# Altium PCB RF.PcbDoc
Units mm, origin at the board's own origin, x right, y up, seen from the top; angles counter-clockwise.
Board outline 90 x 47 mm, 2 copper layers (Top Layer, Bottom Layer); 37 components, 52 nets, 159 pads, 373 vias.
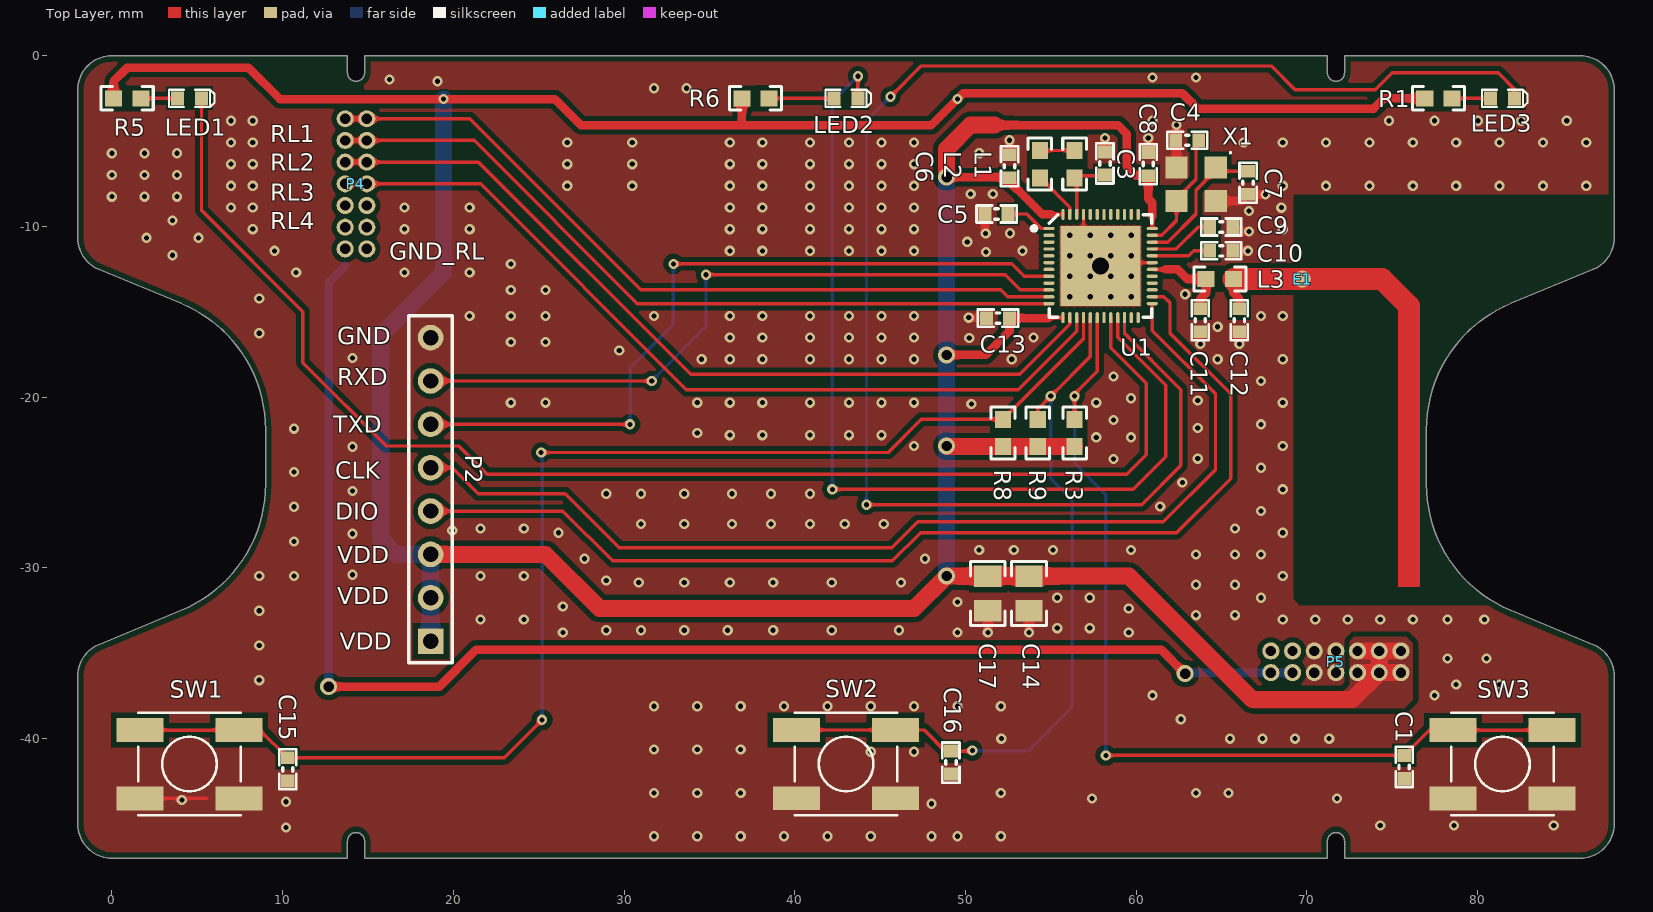
[diagram p0: Top Layer view]
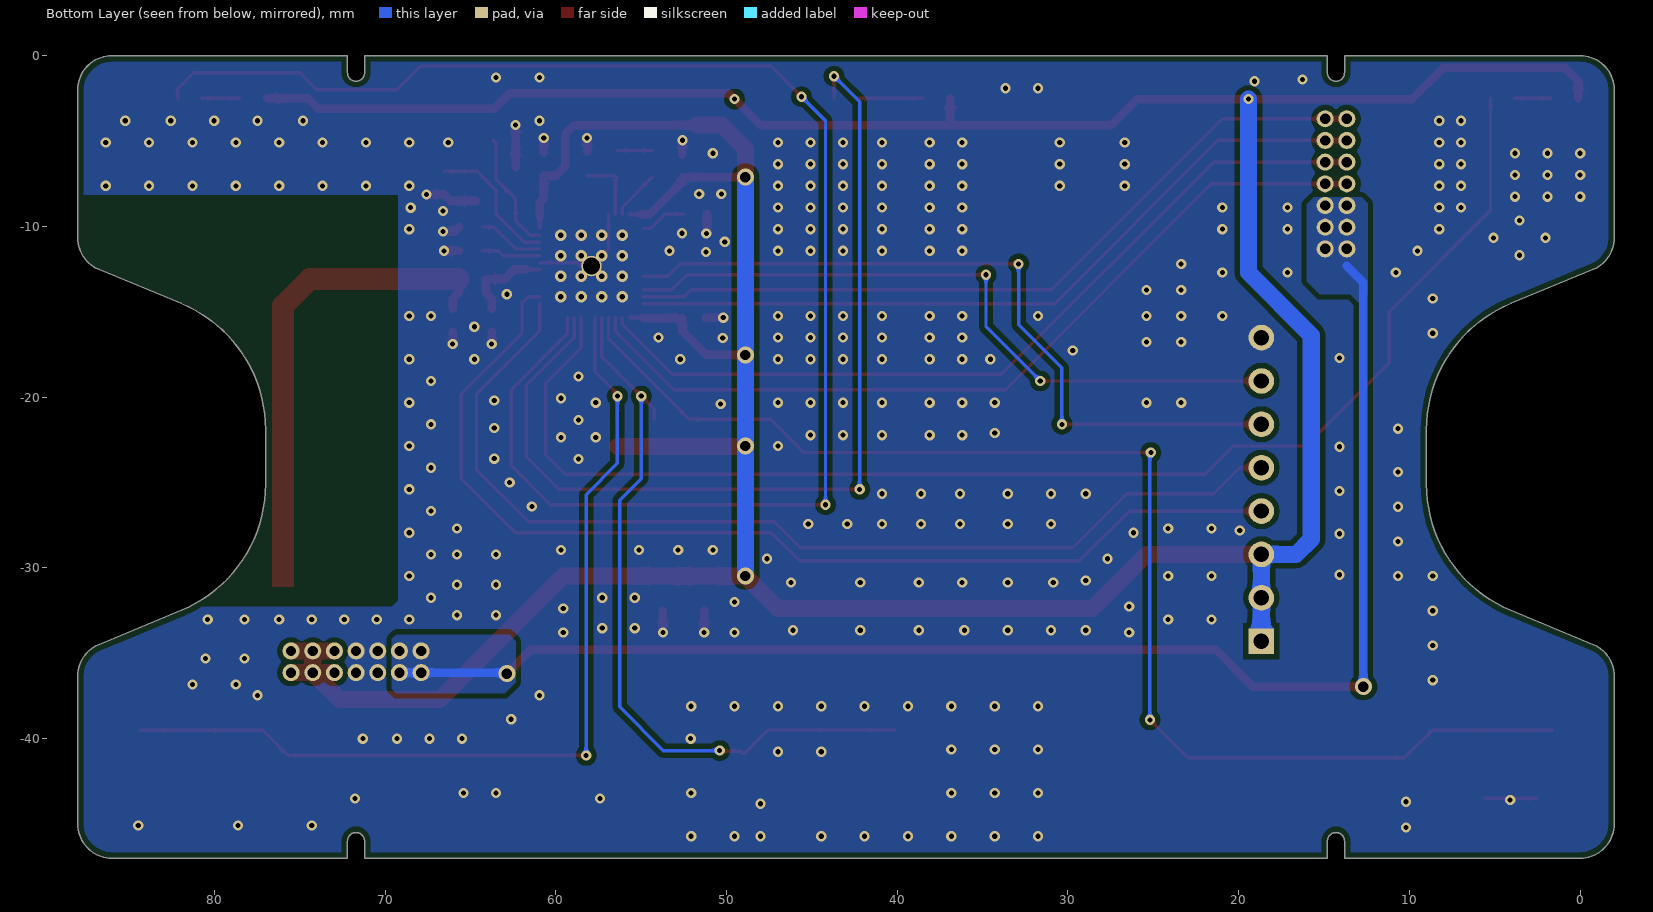
[diagram p1: Bottom Layer view, seen from below]
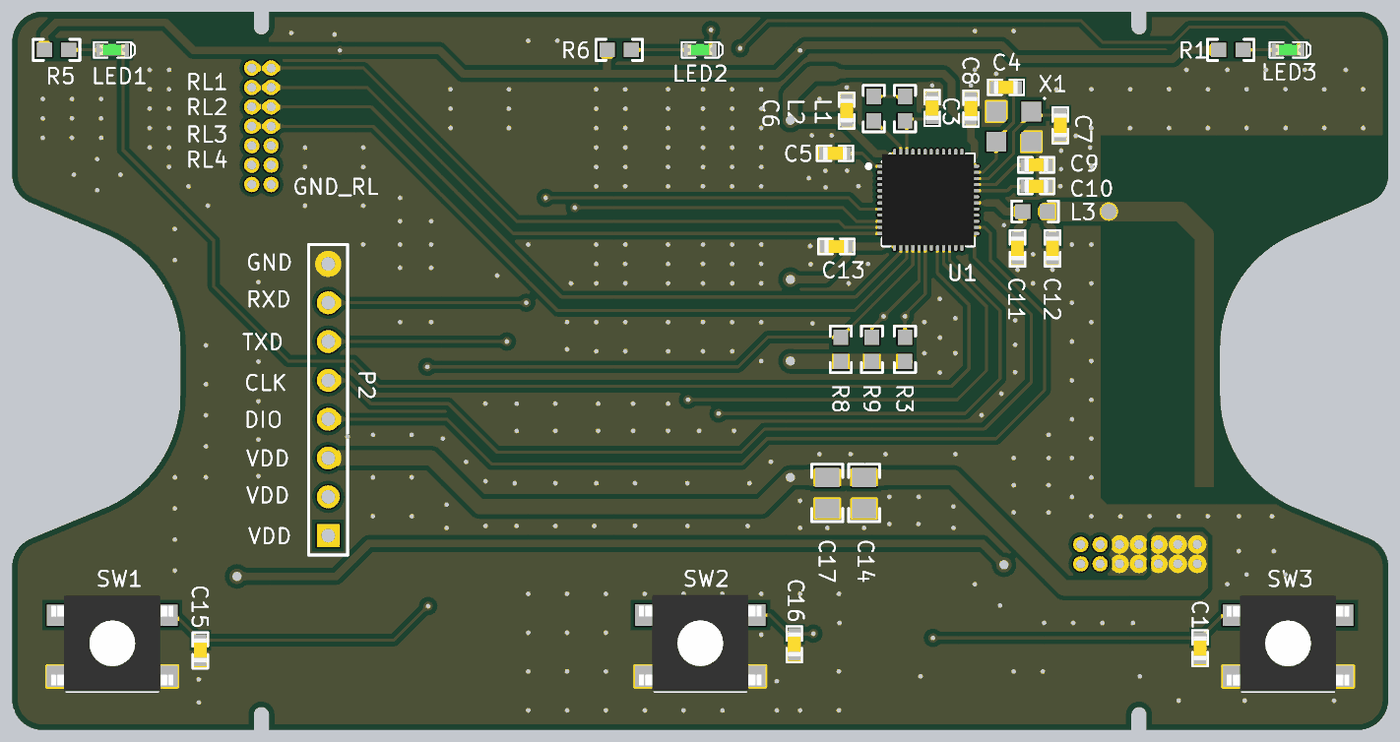
[diagram p2: 3D render of the assembled board from above, using the file's embedded part models]

## Layer stack, top to bottom
Top Solder: solder mask 0.0102, Solder Resist, Dk 3.5
Top Layer: signal copper 0.0356
Dielectric 1: dielectric 0.32, FR-4, Dk 4.8
Bottom Layer: signal copper 0.0356
Bottom Solder: solder mask 0.0102, Solder Resist, Dk 3.5

## Board outline
-2,-45 -2,-36.336 cw(c0,-36.336) -0.765,-34.489 4.061,-32.489 ccw(c1,-25.098) 9,-25.098 9,-21.902 ccw(c1,-21.902) 4.061,-14.511 -0.765,-12.511 cw(c0,-10.664) -2,-10.664 -2,-2 cw(c0,-2) 0,0 13.8,0 13.8,-1 ccw(c14.3,-1) 14.8,-1 14.8,0 71.2,0 71.2,-1 ccw(c71.7,-1) 72.2,-1 72.2,0 86,0 cw(c86,-2) 88,-2 88,-10.664 cw(c86,-10.664) 86.765,-12.511 81.939,-14.511 ccw(c85,-21.902) 77,-21.902 77,-25.098 ccw(c85,-25.098) 81.939,-32.489 86.765,-34.489 cw(c86,-36.336) 88,-36.336 88,-45 cw(c86,-45) 86,-47 72.2,-47 72.2,-46 ccw(c71.7,-46) 71.2,-46 71.2,-47 14.8,-47 14.8,-46 ccw(c14.3,-46) 13.8,-46 13.8,-47 0,-47 cw(c0,-45)

## Design rules (kind name [scope] priority, off if disabled: settings)
Clearance [All] p1: gap=0.3
HoleSize [All] p1: absolutevalues=TRUE maxlimit=10 minlimit=0.025 maxpercent=80.000 minpercent=20.000
MinimumSolderMaskSliver [All] p1: minsoldermaskwidth=0.01
PolygonConnect [All] p1: connectstyle=Direct reliefconductorwidth=0.254 reliefentries=4 polygonreliefangle="90 Angle" airgapwidth=0.254
RoutingVias [All] p1: holewidth=0.711 width=1.27 viastyle="Through Hole" minholewidth=0.3 minwidth=0.3 maxholewidth=5 maxwidth=5
SilkToSilkClearance [All] p1: silktosilkclearance=0.127
SilkToSolderMaskClearance [IsPad] p1: minsilkscreentomaskgap=0.01 clearancetoexposedcopper=TRUE
SolderMaskExpansion [All] p1: expansion=0.102
Width [All] p1: maxlimit=2 minlimit=0.2 preferedwidth=0.254
26 further rules are at their usual default settings.

## Components (designator, comment, footprint, x,y, rotation, side; value= is the part's Value field where it differs from the comment)
C1 "1.0µF" CAPC1608X06L 75.692,-41.656 r90 top
C3 "1.0µF" CAPC1608X06L 58.166,-6.31 r270 top
C4 "12pF" CAPC1608X06L 62.992,-4.953 r180 top
C5 "100nF" CAPC1608X06L 51.816,-9.271 r180 top
C6 "4.7µF" CAPC1608X06L 52.578,-6.477 r90 top
C7 "12pF" CAPC1608X06L 66.548,-7.442 r270 top
C8 "100nF" CAPC1608X06L 60.706,-6.35 r90 top
C9 "100pF" CAPC1608X06L 64.984,-10.033 r0 top
C10 "N.C." CAPC1608X06L 64.984,-11.43 r0 top
C11 "0.8pF" CAPC1608X06L 63.754,-15.494 r90 top
C12 "1.2pF" CAPC1608X06L 66.04,-15.494 r270 top
C13 "100nF" CAPC1608X06L 51.903,-15.367 r180 top
C14 "106" 0805_HV 53.721,-31.496 r90 top
C15 "1.0µF" CAPC1608X06L 10.3,-41.8 r270 top
C16 "1.0µF" CAPC1608X06L 49.149,-41.402 r90 top
C17 "104" 0805_HV 51.308,-31.496 r90 top
E1 "Antenna" nrfant 69.723,-13.081 r270 top locked
L1 "15nH" 0603 56.388,-6.35 r90 top
L2 "10µH" 0603 54.356,-6.35 r270 top
L3 "3.9nH" 0603 64.897,-13.081 r0 top
LED1 "L0603G" LED_0603_G 4.55,-2.5 r180 top
LED2 "L0603G" LED_0603_G 43,-2.5 r180 top
LED3 "L0603G" LED_0603_G 81.45,-2.5 r180 top
P2 "Header 8" HDR1X8 18.669,-34.29 r90 top
P4 "Header 7X2" CON14_1.27 13.664,-3.693 r270 top locked
P5 "Header 7X2" CON14_1.27 75.505,-34.865 r180 top
R1 "220R" 0603 77.7,-2.5 r180 top
R3 "100k" 0603 56.388,-22.098 r270 top
R5 "220R" 0603 0.9,-2.5 r180 top
R6 "220R" 0603 37.7,-2.5 r180 top
R8 "100k" 0603 52.197,-22.098 r270 top
R9 "100k" 0603 54.229,-22.098 r270 top
SW1 "PB SW" KSC521J 4.545,-41.498 r0 top
SW2 "PB SW" KSC521J 43.004,-41.492 r0 top
SW3 "PB SW" KSC521J 81.448,-41.502 r0 top
U1 "nRF52832-QFAA" QFN40P600X600X90-48N 57.912,-12.319 r0 top
X1 "CX3225SB32000D0FFFCC" SON230P260X60-4N 63.507,-7.524 r270 top

## Footprints (in the part's own frame and the unit in brackets; to place one, negate y for a bottom-side part, rotate by r counter-clockwise, add the part's x,y. Pads: shape width x height; smd on the part's side, far side on the other; paste and mask are expansions set on the pad)
0603 [mm] "0603 from SM-752 data"
  rect 1x0.95 smd: 1(-0.8,0) 2(0.8,0)
  silkscreen extent -1.52,-0.69 1.52,0.69, body extent -0.87,-0.47 0.87,0.47, height 1
0805_HV [mil] "0805 with 30mil clearance between pads"
  rect 50x63 smd: 1(-40,0) 2(40,0)
  silkscreen extent -74,-40 74,40, body extent -43,-29 43,29, height 57
CAPC1608X06L [mm]
  rect 0.75x0.8 smd: 1(-0.675,0) 2(0.675,0)
  silkscreen extent -1.17,-0.5 1.17,0.5, body extent -0.8,-0.43 0.8,0.43, height 0.8
CON14_1.27 [mm]
  round 1 hole 0.6: 1(0,0) 2(0,1.27) 3(1.27,0) 4(1.27,1.27) 5(2.54,0) 6(2.54,1.27) 7(3.81,0) 8(3.81,1.27) 9(5.08,0) 10(5.08,1.27) 11(6.35,0) 12(6.35,1.27) 13(7.62,0) 14(7.62,1.27)
HDR1X8 [mm] "Connector; Header; 8 Position"
  rect 1.5x1.5 hole 0.9: 1(0,0)
  round 1.5 hole 0.9: 2(2.54,0) 3(5.08,0) 4(7.62,0) 5(10.16,0) 6(12.7,0) 7(15.24,0) 8(17.78,0)
  silkscreen extent -1.27,-1.27 19.05,1.27
KSC521J [mm] "6.2×6.2mm TACT Switch, without ground connector"
  rect 2.75x1.4 smd: 1(-2.9,-2) 1(2.901,-2) 2(-2.9,2) 2(2.901,2)
  silkscreen extent -3,-2.99 3,3.01, body extent -4,-2.99 4,3.31, height 3.1
LED_0603_G [mil]
  rect 30x32 smd: 1(-27.5,0) 2(27.5,0)
  silkscreen extent -58,-20 48,20, body extent -32,-16 32,16, height 24
nrfant [mm]
  round 1 smd: 1(0,0)
  Top Layer region: 18.047,5.616 18.047,6.886 17.285,6.886 17.285,5.616
  Top Layer lines w1.27: 0,0 0,0.127 0,4.689 1.559,6.248 17.401,6.248
QFN40P600X600X90-48N [mm]
  oval 0.65x0.2 smd: 1(-3.025,2.2) 2(-3.025,1.8) 3(-3.025,1.4) 4(-3.025,1) 5(-3.025,0.6) 6(-3.025,0.2) 7(-3.025,-0.2) 8(-3.025,-0.6) 9(-3.025,-1) 10(-3.025,-1.4) 11(-3.025,-1.8) 12(-3.025,-2.2) 25(3.025,-2.2) 26(3.025,-1.8) 27(3.025,-1.4) 28(3.025,-1) 29(3.025,-0.6) 30(3.025,-0.2) 31(3.025,0.2) 32(3.025,0.6) 33(3.025,1) 34(3.025,1.4) 35(3.025,1.8) 36(3.025,2.2)
  oval 0.2x0.65 smd: 13(-2.2,-3.025) 14(-1.8,-3.025) 15(-1.4,-3.025) 16(-1,-3.025) 17(-0.6,-3.025) 18(-0.2,-3.025) 19(0.2,-3.025) 20(0.6,-3.025) 21(1,-3.025) 22(1.4,-3.025) 23(1.8,-3.025) 24(2.2,-3.025) 37(2.2,3.025) 38(1.8,3.025) 39(1.4,3.025) 40(1,3.025) 41(0.6,3.025) 42(0.2,3.025) 43(-0.2,3.025) 44(-0.6,3.025) 45(-1,3.025) 46(-1.4,3.025) 47(-1.8,3.025) 48(-2.2,3.025)
  rect 4.7x4.7 smd: 49(0,0)
  silkscreen extent -4.02,-3 3,3, body extent -3.02,-3.02 3.02,3.02, height 0.86
SON230P260X60-4N [mm] "SON, 4-Leads, Body 3.25x2.55mm, Pitch 2.30mm, IPC Medium Density"
  rect 1.3x1.3 smd: 1(-0.985,1.15) 2(-0.985,-1.15) 3(0.985,-1.15) 4(0.985,1.15)
  silkscreen extent -1.9,1.96 -1.8,2.06, body extent -1.3,-1.65 1.3,1.65, height 0.6

## Part data
C1 C15 C16: library part C0402-1µ0, "Capacitor, X5R, ±5%"
C3: library part C0603-1µ0, "Capacitor, X7R, ±10%"
C4 C7: library part C0402-12p, "Capacitor, NP0, ±2%"
C5 C8 C13: library part C0402-100n, "Capacitor, X7R, ±10%"
C6: library part C0603-4µ7, "Capacitor, X5R, ±10%"
C9: library part C0402-100p, "Capacitor, NP0, ±5%"
C10: library part C0402-N.C., "Not mounted"
C11: library part C0402-0.8p, "Capacitor, NP0, ±5%"
C12: library part C0402-1.2p, "Capacitor, NP0, ±0.1pF"
C14 C17: library part CM, "Cap SMD"
E1: "Generic Antenna"
L1: library part L0402-15n, "Inductor, 320mA, ±5%"
L2: library part L0603-10µ, "Inductor, 80mA, ±10%"
L3: library part L0402-3n9, "Inductor, 170mA, ±0.1nH"
LED1 LED2 LED3: library part "LG L29K Smartled Green", "LED SMARTLED GREEN 570NM 0603"
P2: "Header, 8-Pin"
P4 P5: "Header, 7-Pin, Dual row"
R1 R5 R6: library part R0402-220, "Resistor, ±1%, 0.063W"
R3 R8 R9: library part R0402-100k, "Resistor, ±1%, 0.063W"
SW1 SW2 SW3: library part Switch-PB-6.2x6.3mm-SMD, "Tactile Switch, SPNO, SMD, 160gf, 6.2x6.3x2.5mm"
U1: "Multi-protocol Bluetooth Low Energy and 2.4GHz proprietary system-on-chip"
X1: library part XTAL_SMD2016_32MHz_8pF_Epson, "XTAL SMD 2016, 32MHz, Cl=8pF, Tol: ±10ppm, Stab: ±10ppm"

## Free pads (board coordinates)
  round 1.2 hole 1: 0(57.912,-12.319)

## Via types
v1: diameter 0.6, hole 0.3, Top Layer to Bottom Layer, tented both sides, 351 vias
v2: diameter 0.66, hole 0.33, Top Layer to Bottom Layer, tented both sides, 16 vias
v3: diameter 1, hole 0.6, Top Layer to Bottom Layer, tented both sides, 6 vias

## Nets (pads, with @x,y where several pads share a name; then routed paths per layer and width w, separated by ;. In a path a pad name is that pad's centre, name@x,y a point inside that pad or via, vN(x,y) a via of type N, cw(c..) or ccw(c..) an arc to the next point about the centre after c; other vN are vias at no path point)
ANT: C12.1 E1.1 L3.2 | length 6
  Top Layer w0.5: L3.2 65.697,-13.881 66.04,-14.224 C12.1
  Top Layer w1.27: L3.2 E1.1 E1.1@69.85,-13.081
BUTTON1: C15.1 R8.1 SW1.2 U1.16 | length 76.5
  Top Layer w0.2: SW1.2@1.645,-39.498 7.446,-39.498 8.673,-39.498 C15.1 22.975,-41.125 v1(25.2,-38.9) ; v1(25.146,-23.241) 45.466,-23.241 47.409,-21.298 R8.1@52.108,-21.298 ; R8.1 56.912,-16.583 U1.16
  Bottom Layer w0.2: v1(25.146,-23.241) 25.2,-23.295 v1(25.2,-38.9)
BUTTON2: C16.2 R9.1 SW2.2 U1.17 | length 43.8
  Top Layer w0.2: SW2.2@40.104,-39.492 45.905,-39.492 47.568,-39.492 48.976,-40.9 C16.2 50.373,-40.727 v1(50.4,-40.7) ; R9.1 54.229,-20.701 v1(54.991,-19.939) 57.312,-17.618 U1.17
  Bottom Layer w0.2: v1(50.4,-40.7) 53.7,-40.7 56.261,-38.139 56.261,-26.035 54.991,-24.765 v1(54.991,-19.939)
BUTTON3: C1.2 R3.1 SW3.2 U1.18 | length 55
  Top Layer w0.2: R3.1 v1(56.388,-19.939) 56.388,-19.812 57.712,-18.488 U1.18 ; v1(58.219,-40.981) C1.2 77.171,-39.502 78.548,-39.502 SW3.2@84.349,-39.502
  Bottom Layer w0.2: v1(56.388,-19.939) 56.388,-23.876 58.219,-25.707 v1(58.219,-40.981)
CTS: 
DEC1: C5.1 U1.1 | length 2.7
  Top Layer w0.2: C5.1 53.594,-9.271 54.442,-10.119 U1.1
DEC2: C10.1 U1.32 | length 3.5
  Top Layer w0.2: U1.32 63.084,-11.719 63.373,-11.43 C10.1
DEC3: C9.1 U1.33 | length 3.9
  Top Layer w0.2: U1.33 62.341,-11.319 63.627,-10.033 C9.1
DEC4: C3.2 L1.1 U1.46 | length 4
  Top Layer w0.2: U1.46 56.512,-7.274 L1.1 56.513,-7.025 C3.2@58.166,-7.025
GND: C1.1 C3.1 C4.2 C5.2 C6.2 C7.2 C8.2 C9.2 C10.2 C11.1 C12.2 C13.2 C14.1 C15.2 C16.1 C17.1 P2.8 P5.7 P5.8 P5.9 P5.10 pad.0 SW1.1 SW2.1 SW3.1 U1.31 U1.45 U1.49 X1.2 X1.4 | length 25.8
  Top Layer w0.2: SW1.1@2.54,-43.499 5.568,-43.499 ; U1.45 56.912,-11.319 v2(57.312,-11.719) pad.0 58.112,-12.119 U1.31
  Top Layer w0.5: v1(50.19,-15.342) 51.203,-15.342 C13.2 ; C5.2 51.141,-10.374 v1(51.181,-10.414) ; v1(51.308,-33.782) C17.1 ; C6.2 v1(52.578,-4.953) ; v1(53.721,-33.782) C14.1 ; C3.1 v1(58.166,-4.826) ; C8.2 v1(60.706,-4.826) ; X1.2 v1(62.357,-4.064) ; v1(63.754,-16.891) C11.1 ; X1.4 66.156,-8.509 C7.2 67.553,-8.117 v1(67.564,-8.128) ; C10.2 v1(66.548,-11.43) ; C9.2 65.926,-10.3 v1(66.6,-10.3) ; v1(66.04,-16.891) C12.2
  other v1: 31.75,-45.72 34.29,-45.72 36.83,-45.72 39.37,-45.72 41.91,-45.72 44.45,-45.72 48.006,-45.72 49.53,-45.72 52.07,-45.72 10.2,-45.2 74.295,-45.085 78.613,-45.085 84.455,-45.085 48.006,-43.815 10.2,-43.7 4.1,-43.6 57.404,-43.499 71.755,-43.499 31.75,-43.18 34.29,-43.18 36.83,-43.18 52.07,-43.18 63.5,-43.18 65.405,-43.18 44.45,-40.767 46.99,-40.767 31.75,-40.64 34.29,-40.64 36.83,-40.64 52.1,-40 65.49,-40 67.395,-40 69.3,-40 71.3,-40 62.611,-38.862 31.75,-38.1 34.29,-38.1 36.83,-38.1 39.37,-38.1 41.91,-38.1 44.45,-38.1 46.99,-38.1 49.53,-38.1 52.07,-38.1 60.96,-37.465 77.47,-37.465 78.74,-36.83 81.28,-36.83 8.636,-36.576 78.232,-35.306 80.518,-35.306 8.636,-34.544 26.416,-33.782 49.53,-33.782 59.563,-33.782 28.956,-33.655 30.988,-33.655 33.528,-33.655 36.068,-33.655 38.735,-33.655 42.164,-33.655 46.101,-33.655 55.372,-33.528 57.277,-33.528 21.59,-33.02 24.13,-33.02 68.58,-33.02 70.485,-33.02 72.39,-33.02 74.295,-33.02 76.2,-33.02 78.232,-33.02 80.391,-33.02 63.5,-32.766 65.786,-32.766 8.636,-32.512 59.563,-32.385 26.416,-32.258 49.53,-32.004 55.372,-31.75 57.277,-31.75 67.31,-31.75 63.5,-30.988 65.786,-30.988 30.861,-30.861 33.528,-30.861 36.195,-30.861 38.735,-30.861 42.164,-30.861 46.228,-30.861 28.956,-30.734 8.636,-30.48 10.668,-30.48 21.59,-30.48 24.13,-30.48 68.58,-30.48 14.1,-30.4 27.686,-29.464 47.625,-29.464 63.5,-29.21 65.786,-29.21 67.31,-29.21 50.8,-28.956 52.832,-28.956 55.118,-28.956 59.69,-28.956 10.668,-28.448 14.1,-28 26.162,-27.94 68.58,-27.94 19.939,-27.813 21.59,-27.686 24.13,-27.686 65.786,-27.686 30.988,-27.432 33.528,-27.432 36.322,-27.432 38.608,-27.432 40.894,-27.432 42.926,-27.432 45.212,-27.432 67.31,-26.67 10.668,-26.416 61.4,-26.4 28.956,-25.654 30.988,-25.654 33.528,-25.654 36.322,-25.654 38.608,-25.654 40.894,-25.654 14.1,-25.5 68.58,-25.4 62.7,-25 10.668,-24.384 67.31,-24.13 58.674,-23.622 63.6,-23.6 14.1,-22.9 46.99,-22.86 68.58,-22.86 57.658,-22.352 59.69,-22.352 36.195,-22.225 38.1,-22.225 40.894,-22.225 43.18,-22.225 45.085,-22.225 34.29,-22.098 10.668,-21.844 63.6,-21.8 67.31,-21.59 58.674,-21.336 50.343,-20.396 23.368,-20.32 25.4,-20.32 34.29,-20.32 36.195,-20.32 38.1,-20.32 40.894,-20.32 43.18,-20.32 45.085,-20.32 46.99,-20.32 57.658,-20.32 68.58,-20.32 63.6,-20.2 59.69,-20.066 67.31,-19.05 58.674,-18.796 34.544,-17.78 36.195,-17.78 38.1,-17.78 40.894,-17.78 43.18,-17.78 45.085,-17.78 46.99,-17.78 52.705,-17.78 64.77,-17.78 68.58,-17.78 14.1,-17.7 29.718,-17.272 23.368,-16.764 25.4,-16.764 50.216,-16.535 36.195,-16.51 38.1,-16.51 40.894,-16.51 43.18,-16.51 45.085,-16.51 46.99,-16.51 53.975,-16.51 8.636,-16.256 64.77,-15.875 20.955,-15.24 23.368,-15.24 25.4,-15.24 31.75,-15.24 36.195,-15.24 38.1,-15.24 40.894,-15.24 43.18,-15.24 45.085,-15.24 46.99,-15.24 67.31,-15.24 68.58,-15.24 8.636,-14.224 62.865,-13.97 23.368,-13.716 25.4,-13.716 10.795,-12.7 17.145,-12.7 20.955,-12.7 23.368,-12.192 3.556,-11.684 51.2,-11.5 9.525,-11.43 36.195,-11.43 38.1,-11.43 40.894,-11.43 43.18,-11.43 45.085,-11.43 46.99,-11.43 53.34,-11.43 50.1,-10.9 2.032,-10.668 5.08,-10.668 52.6,-10.4 8.255,-10.16 17.145,-10.16 20.955,-10.16 36.195,-10.16 38.1,-10.16 40.894,-10.16 43.18,-10.16 45.085,-10.16 46.99,-10.16 68.58,-10.16 3.556,-9.652 66.6,-9.1 68.5,-8.9 6.985,-8.89 8.255,-8.89 17.145,-8.89 20.955,-8.89 36.195,-8.89 38.1,-8.89 40.894,-8.89 43.18,-8.89 45.085,-8.89 46.99,-8.89 0,-8.255 1.905,-8.255 3.81,-8.255 50.3,-8.1 51.6,-8.1 6.985,-7.62 8.255,-7.62 26.67,-7.62 30.48,-7.62 36.195,-7.62 38.1,-7.62 40.894,-7.62 43.18,-7.62 45.085,-7.62 46.99,-7.62 68.58,-7.62 71.12,-7.62 73.66,-7.62 76.2,-7.62 78.74,-7.62 81.28,-7.62 83.82,-7.62 86.36,-7.62 0,-6.985 1.905,-6.985 3.81,-6.985 6.985,-6.35 8.255,-6.35 26.67,-6.35 30.48,-6.35 36.195,-6.35 38.1,-6.35 40.894,-6.35 43.18,-6.35 45.085,-6.35 46.99,-6.35 0,-5.715 1.905,-5.715 3.81,-5.715 50.8,-5.715 6.985,-5.08 8.255,-5.08 26.67,-5.08 30.48,-5.08 36.195,-5.08 38.1,-5.08 40.894,-5.08 43.18,-5.08 45.085,-5.08 46.99,-5.08 66.294,-5.08 68.58,-5.08 71.12,-5.08 73.66,-5.08 76.2,-5.08 78.74,-5.08 81.28,-5.08 83.82,-5.08 86.36,-5.08 6.985,-3.81 8.255,-3.81 60.96,-3.81 74.803,-3.81 77.47,-3.81 80.01,-3.81 82.55,-3.81 85.217,-3.81 31.75,-1.905 33.655,-1.905 19.075,-1.499 16.256,-1.397 60.96,-1.27 63.5,-1.27
  other v2: 56.112,-14.119 57.312,-14.119 58.512,-14.119 59.712,-14.119 56.112,-12.919 57.312,-12.919 58.512,-12.919 59.712,-12.919 56.112,-11.719 58.512,-11.719 59.712,-11.719 56.112,-10.519 57.312,-10.519 58.512,-10.519 59.712,-10.519
GND_RL: P4.9 P4.10 P4.11 P4.12 P4.13 P4.14 P5.11 P5.12 P5.13 P5.14 | length 83
  Top Layer w0.5: v3(12.7,-36.957) 19.177,-36.957 21.336,-34.798 61.468,-34.798 v3(62.865,-36.195)
  Bottom Layer w0.5: v3(12.7,-36.957) 12.7,-13.275 13.665,-12.31 ; v3(62.865,-36.195) 62.925,-36.135 P5.14 P5.12
LED1: LED1.1 U1.20 | length 79.4
  Top Layer w0.2: LED1.1 5.249,-9.059 11.176,-14.986 11.176,-17.976 16.06,-22.86 20.32,-22.86 21.971,-24.511 59.436,-24.511 60.579,-23.368 60.579,-19.177 58.512,-17.11 U1.20
LED2: LED2.1 U1.21 | length 55.7
  Top Layer w0.2: v1(42.2,-25.4) 59.817,-25.4 61.722,-23.495 61.722,-19.304 58.912,-16.494 U1.21 ; LED2.1 43.699,-1.201 v1(43.7,-1.2)
  Bottom Layer w0.2: v1(42.2,-25.4) 42.2,-2.7 v1(43.7,-1.2)
LED3: LED3.1 U1.22 | length 94.7
  Top Layer w0.2: v1(44.2,-26.3) 60.314,-26.3 62.611,-24.003 62.611,-19.558 59.312,-16.259 U1.22 ; 46.736,-1.27 v1(45.606,-2.4) 45.606,-2.394 47.4,-0.6 67.9,-0.6 69.3,-2 74,-2 75,-1 81.2,-1 82.148,-1.949 LED3.1
  Bottom Layer w0.2: v1(44.2,-26.3) 44.2,-3.806 v1(45.606,-2.4)
NetC11_2: C11.2 L3.1 U1.30 | length 5.3
  Top Layer w0.2: U1.30 61.722,-12.519
  Top Layer w0.5: 61.722,-12.519 62.43,-12.519 62.992,-13.081 L3.1 64.097,-13.881 63.754,-14.224 C11.2
NetL1_2: L1.2 L2.1 | length 2
  Top Layer w0.2: L2.1 L1.2
NetL2_2: L2.2 U1.47 | length 2.9
  Top Layer w0.2: L2.2 54.394,-7.15 56.112,-8.868 U1.47
NetLED1_2: LED1.2 R5.1 | length 2.2
  Top Layer w0.2: R5.1 LED1.2
NetLED2_2: LED2.2 R6.1 | length 3.8
  Top Layer w0.2: R6.1 LED2.2
NetLED3_2: LED3.2 R1.1 | length 2.3
  Top Layer w0.2: R1.1 LED3.2
P0.00: U1.2
P0.01: U1.3
P0.02: U1.4
P0.03: U1.5
P0.04: U1.6
P0.05: U1.7
P0.06: P2.6 U1.8 | length 44.4
  Top Layer w0.2: P2.6 v1(30.353,-21.59) ; v1(32.893,-12.192) 52.705,-12.192 53.432,-12.919 U1.8
  Bottom Layer w0.2: v1(30.353,-21.59) 30.353,-18.288 32.893,-15.748 v1(32.893,-12.192)
P0.07: U1.9
P0.08: P2.7 U1.10 | length 41
  Top Layer w0.2: P2.7 v1(31.623,-19.05) ; v1(34.798,-12.827) 52.324,-12.827 53.216,-13.719 U1.10
  Bottom Layer w0.2: v1(31.623,-19.05) 34.798,-15.875 v1(34.798,-12.827)
P0.11: P4.5 P4.6 U1.14 | length 49.2
  Top Layer w0.2: P4.5 P4.6 21.473,-6.233 33.909,-18.669 53.178,-18.669 56.112,-15.735 U1.14
P0.12: P4.7 P4.8 U1.15 | length 50
  Top Layer w0.2: P4.7 P4.8 21.6,-7.503 33.655,-19.558 53.083,-19.558 56.512,-16.129 U1.15
P0.16: U1.19
P0.20: U1.23
P0.21: U1.24
P0.22: U1.27
P0.23: U1.28
P0.24: U1.29
P0.25: U1.37
P0.26: U1.38
P0.27: U1.39
P0.28: U1.40
P0.29: U1.41
P0.30: U1.42
P0.31: U1.43
RL1C: P4.1 P4.2 U1.11 | length 45.5
  Top Layer w0.2: P4.1 P4.2 20.965,-3.693 30.988,-13.716 52.07,-13.716 52.473,-14.119 U1.11
RL2C: P4.3 P4.4 U1.12 | length 45.2
  Top Layer w0.2: P4.3 P4.4 21.219,-4.963 30.775,-14.519 U1.12
RTS: 
SWDCLK: P2.5 U1.25 | length 61.1
  Top Layer w0.2: P2.5 19.939,-24.13 21.463,-25.654 26.543,-25.654 29.718,-28.829 45.678,-28.829 47.202,-27.305 61.595,-27.305 64.643,-24.257 64.643,-19.812 60.937,-16.106 U1.25
SWDIO: P2.4 U1.26 | length 63
  Top Layer w0.2: P2.4 26.416,-26.67 29.337,-29.591 45.72,-29.591 47.371,-27.94 62.357,-27.94 65.532,-24.765 65.532,-19.812 61.976,-16.256 61.976,-14.478 61.617,-14.119 U1.26
VDD_NRF: C6.1 C8.1 C13.1 C14.2 C17.2 P2.1 P2.2 P2.3 P5.1 P5.2 P5.3 P5.4 P5.5 P5.6 R1.2 R3.2 R5.2 R6.2 R8.2 R9.2 U1.13 U1.36 U1.48 | length 251.3
  Top Layer w0.2: C6.1@52.538,-7.112 C6.1 C6.1@52.578,-7.366 ; 54.864,-15.344 U1.13 ; 54.991,-9.294 U1.48 ; U1.36 60.937,-9.398
  Top Layer w0.5: R5.2 0.1,-1.5 0.9,-0.7 8,-0.7 9.84,-2.54 v1(19.431,-2.54) 25.94,-2.54 27.464,-4.064 36.8,-4.064 ; R6.2 36.9,-3.964 36.8,-4.064 ; v3(48.895,-17.526) 51.181,-17.526 52.578,-16.129 C13.1 54.841,-15.367 54.864,-15.344 ; v3@49.276,-7.112 C6.1@52.538,-7.112 ; 51.689,-4.064 58.928,-4.064 59.436,-4.572 59.436,-6.477 59.984,-7.025 C8.1 60.706,-8.382 60.937,-8.613 60.937,-9.398 ; C6.1@52.578,-7.366 54.506,-9.294 54.991,-9.294 ; R1.2 74.5,-2.5 73.9,-3.1 63.6,-3.1 62.7,-2.2 49.87,-2.2 v1(49.53,-2.54) 48.006,-4.064 36.8,-4.064
  Top Layer w1: P2.3 25.4,-29.21 28.575,-32.385 46.99,-32.385 v3(48.895,-30.48) C17.2 C14.2 59.563,-30.48 66.802,-37.719 72.644,-37.719 P5.4@74.228,-36.135 ; v3(48.895,-22.86) 48.933,-22.898 R8.2 R9.2 R3.2 ; v3@48.895,-6.731 48.895,-5.461 50.292,-4.064 51.689,-4.064 ; P5.6 P5.4@74.228,-36.135 ; P5.5 P5.3 ; P5.2 P5.4 ; P5.1 P5.3 ; P5.4@74.228,-36.135 P5.4 ; P5.4 P5.3
  Bottom Layer w0.2: v3@48.895,-7.239 v3(48.895,-7.112)
  Bottom Layer w1: P2.1 P2.2 P2.3 16.637,-29.21 15.748,-28.321 15.748,-16.383 19.431,-12.7 v1(19.431,-2.54) ; v3(48.895,-30.48) v3(48.895,-22.86) v3(48.895,-17.526) ; v3@48.895,-17.272 v3@48.895,-7.239
XC1: C7.1 U1.34 X1.1 | length 8.2
  Top Layer w0.2: U1.34 61.852,-10.919 63.5,-9.271 63.5,-7.874 64.657,-6.717 64.707,-6.767 C7.1
XC2: C4.1 U1.35 X1.3 | length 7
  Top Layer w0.2: U1.35 61.49,-10.519 62.357,-9.652 X1.3 62.357,-8.382 63.5,-7.239 63.5,-5.12 C4.1
pads on no net: U1.44

## Polygon pours and split planes (outlines as drawn)
GND_RL on Bottom Layer "Bottom Layer-No Net" (solid, remove dead copper, pour order 8): 12.446,-13.97 12.446,-9.652 12.446,-8.654 12.8,-8.3 14.4,-8.3 15.6,-8.3 15.9,-8.6 16.002,-8.702 16.002,-9.652 16.002,-12.098 15.4,-12.7
GND on Bottom Layer "Bottom Layer-No Net" (solid, remove dead copper, pour order 9): 193 vertices, not listed, extent -2.032,-46.892 88,0.108
GND_RL on Bottom Layer "Bottom Layer-No Net" (solid, remove dead copper, pour order 10): 15.748,-9.271 13.589,-9.271 12.827,-9.271 12.573,-9.525 12.446,-9.652 12.446,-13.843 12.446,-13.97 12.954,-14.478 13.462,-13.97 14.224,-13.97 15.24,-13.97 16.002,-13.208 16.002,-9.525
GND_RL on Bottom Layer "Bottom Layer-No Net" (solid, remove dead copper, pour order 11): 69.596,-37.084 69.596,-34.163 69.342,-33.909 68.453,-33.909 62.738,-33.909 62.357,-34.29 62.357,-35.687 62.357,-36.703 62.738,-37.084 62.992,-37.338 64.262,-37.338 69.342,-37.338 69.596,-37.084
GND on Top Layer "Bottom Layer-No Net" (solid, remove dead copper, pour order 7): 187 vertices, not listed, extent -2.047,-46.845 87.985,0.155
VDD_NRF on Top Layer "Bottom Layer-No Net" (solid, remove dead copper, pour order 12): 72.517,-34.29 72.517,-36.83 72.39,-36.957 72.136,-37.211 71.755,-37.211 66.929,-37.211 66.675,-37.465 66.802,-37.592 66.802,-38.227 74.803,-38.227 75.692,-38.227 75.946,-37.973 76.2,-37.719 76.2,-36.068 76.2,-34.417 75.946,-34.163 75.819,-34.036 73.787,-34.036 72.771,-34.036 72.517,-34.29

## Silkscreen, mask and mechanical layers (free items; w line width, h text height)
Top Overlay:
  text "RL1" at 9.271,-5.08 h1
  text "RL2" at 9.271,-6.731 h1
  text "RL3" at 9.271,-8.509 h1
  text "RL4" at 9.271,-10.16 h1
  text "GND_RL" at 16.256,-11.938 h1
  text "GND" at 13.208,-16.891 h1
  text "RXD" at 13.208,-19.304 h1
  text "TXD" at 12.954,-22.098 h1
  text "CLK" at 13.081,-24.765 h1
  text "DIO" at 13.081,-27.178 h1
  text "VDD" at 13.208,-29.718 h1
  text "VDD" at 13.208,-32.131 h1
  text "VDD" at 13.335,-34.798 h1
Mechanical 2:
  circle w0.006: c96.171,-49 r0.003
  circle w0.006: c86,-49 r0.003
  circle w0.006: c86,0 r0.003
  circle w0.006: c-2,9.526 r0.003
  circle w0.006: c-2,-2 r0.003
  circle w0.006: c88,-2 r0.003
  lines w0.1: -2,-45 ccw(c0,-45) 0,-47 13.8,-47 13.8,-46 cw(c14.3,-46) 14.8,-46 14.8,-47 71.2,-47 71.2,-46 cw(c71.7,-46) 72.2,-46 72.2,-47 86,-47 ccw(c86,-45) 88,-45 88,-36.336 ccw(c86,-36.336) 86.765,-34.489 81.939,-32.489 cw(c85,-25.098) 77,-25.098 77,-21.902 cw(c85,-21.902) 81.939,-14.511 86.765,-12.511 ccw(c86,-10.664) 88,-10.664 88,-2 ccw(c86,-2) 86,0 72.2,0 72.2,-1 cw(c71.7,-1) 71.2,-1 71.2,0 14.8,0 14.8,-1 cw(c14.3,-1) 13.8,-1 13.8,0 0,0 ccw(c0,-2) -2,-2 -2,-10.664 ccw(c0,-10.664) -0.765,-12.511 4.061,-14.511 cw(c1,-21.902) 9,-21.902 9,-25.098 cw(c1,-25.098) 4.061,-32.489 -0.765,-34.489 ccw(c0,-36.336) -2,-36.336 -2,-45
Mechanical 3:
  circle w0.013: c70.435,-36.135 r0.25
  circle w0.013: c74.245,-34.865 r0.25
  circle w0.013: c75.515,-34.865 r0.25
  circle w0.013: c75.515,-36.135 r0.25
  circle w0.013: c74.245,-36.135 r0.25
  circle w0.013: c72.975,-36.135 r0.25
  circle w0.013: c71.705,-36.135 r0.25
  circle w0.013: c70.435,-34.865 r0.25
  circle w0.013: c71.705,-34.865 r0.25
  circle w0.013: c13.665,-6.235 r0.25
  circle w0.013: c14.935,-10.045 r0.25
  circle w0.013: c14.935,-11.315 r0.25
  circle w0.013: c13.665,-11.315 r0.25
  circle w0.013: c13.665,-10.045 r0.25
  circle w0.013: c13.665,-8.775 r0.25
  circle w0.013: c13.665,-7.505 r0.25
  circle w0.013: c14.935,-6.235 r0.25
  circle w0.013: c14.935,-7.505 r0.25
  circle w0.013: c14.935,-8.775 r0.25
  circle w0.013: c72.975,-34.865 r0.25
  circle w0.013: c69.165,-36.135 r0.25
  circle w0.013: c67.895,-36.135 r0.25
  circle w0.013: c67.895,-34.865 r0.25
  circle w0.013: c69.165,-34.865 r0.25
  circle w0.013: c13.665,-4.965 r0.25
  circle w0.013: c14.935,-4.965 r0.25
  lines w0.013: -26.665,-140.004 ccw(c-26.551,-140.004) -26.551,-140.118 ; -26.665,-139.813 -26.619,-139.813 ; -26.665,-139.788 -26.619,-139.788 ; 4.55,-3.25 4.55,-1.75 ; 43,-3.25 43,-1.75 ; 81.45,-3.25 81.45,-1.75 ; 0.25,-44 3.05,-44 3.05,-43 0.25,-43 0.25,-44 ; 0.25,-40 0.25,-39 3.05,-39 3.05,-40 0.25,-40 ; 3.3,-3.25 3.3,-1.75 5.8,-1.75 5.8,-3.25 3.3,-3.25 ; 6.05,-44 6.05,-43 8.85,-43 8.85,-44 6.05,-44 ; 6.05,-40 6.05,-39 8.85,-39 8.85,-40 6.05,-40 ; 12.775,-12.2 15.825,-12.2 15.825,-2.8 12.775,-2.8 12.775,-12.2 ; 13.85,-47.5 13.85,-44.5 14.75,-44.5 14.75,-47.5 13.85,-47.5 ; 13.85,-2.5 14.75,-2.5 14.75,0.5 13.85,0.5 13.85,-2.5 ; 21,-24.1 22.9,-24.1 22.9,-26 24.1,-26 24.1,-24.1 26,-24.1 26,-22.9 24.1,-22.9 24.1,-21 22.9,-21 22.9,-22.9 21,-22.9 21,-24.1 ; 38.7,-44 38.7,-43 41.5,-43 41.5,-44 38.7,-44 ; 38.7,-40 41.5,-40 41.5,-39 38.7,-39 38.7,-40 ; 41.75,-3.25 41.75,-1.75 44.25,-1.75 44.25,-3.25 41.75,-3.25 ; 44.5,-44 47.3,-44 47.3,-43 44.5,-43 44.5,-44 ; 44.5,-40 47.3,-40 47.3,-39 44.5,-39 44.5,-40 ; 60,-24.1 61.9,-24.1 61.9,-26 63.1,-26 63.1,-24.1 65,-24.1 65,-22.9 63.1,-22.9 63.1,-21 61.9,-21 61.9,-22.9 60,-22.9 60,-24.1 ; 67,-37.025 76.4,-37.025 76.4,-33.975 67,-33.975 67,-37.025 ; 71.25,-47.5 72.15,-47.5 72.15,-44.5 71.25,-44.5 71.25,-47.5 ; 71.25,-2.5 72.15,-2.5 72.15,0.5 71.25,0.5 71.25,-2.5 ; 77.15,-44 77.15,-43 79.95,-43 79.95,-44 77.15,-44 ; 77.15,-40 79.95,-40 79.95,-39 77.15,-39 77.15,-40 ; 80.2,-3.25 80.2,-1.75 82.7,-1.75 82.7,-3.25 80.2,-3.25 ; 82.95,-44 85.75,-44 85.75,-43 82.95,-43 82.95,-44 ; 82.95,-40 85.75,-40 85.75,-39 82.95,-39 82.95,-40